# Altium PCB LED strip driver V2.PcbDoc
Units mm, origin at the board's own origin, x right, y up, seen from the top; angles counter-clockwise.
Board outline 41.35 x 36.82 mm, 2 copper layers (Top Layer, Bottom Layer); 37 components, 35 nets, 122 pads, 15 vias.
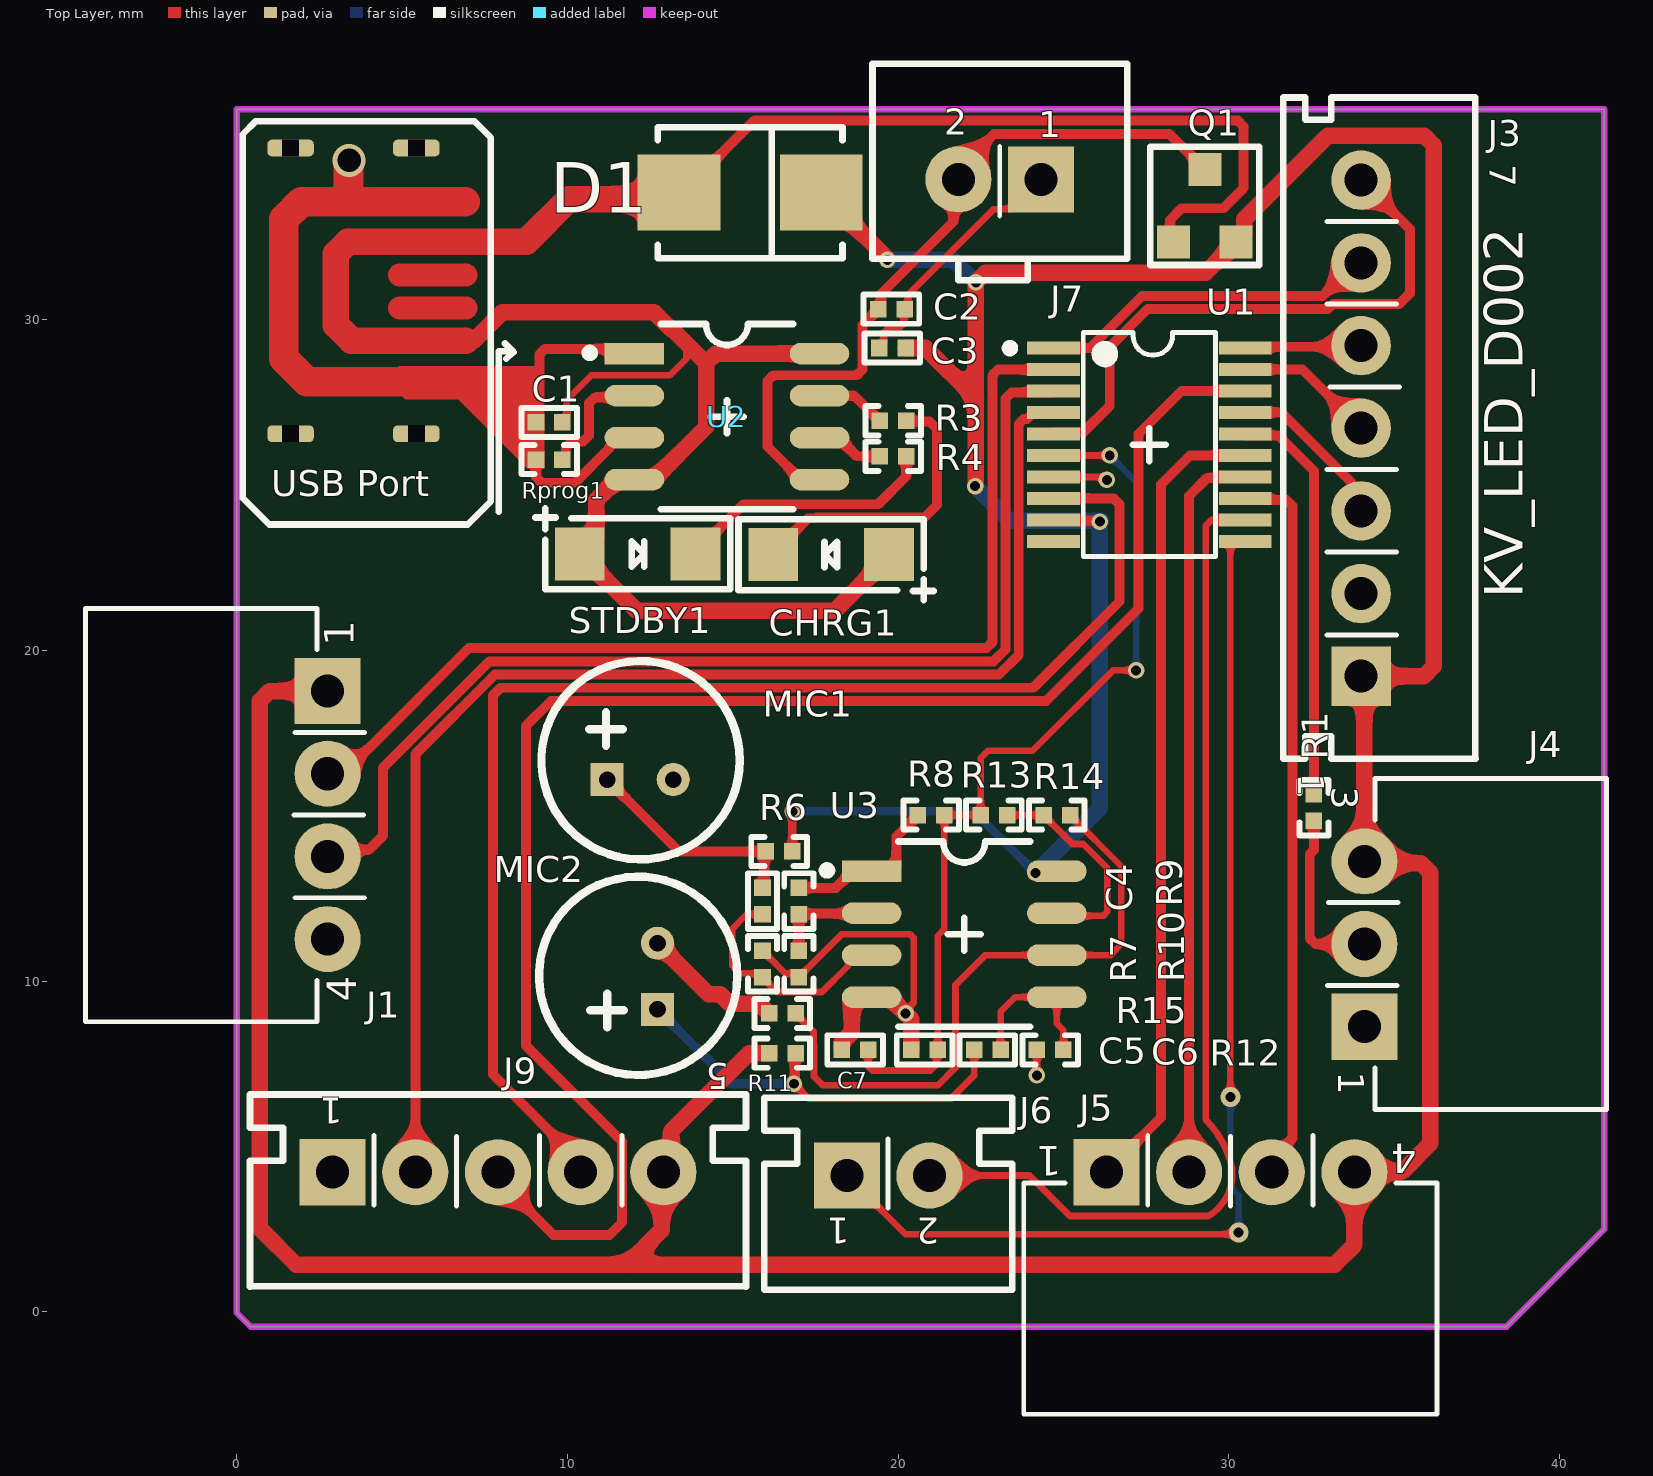
[diagram p0: Top Layer view]
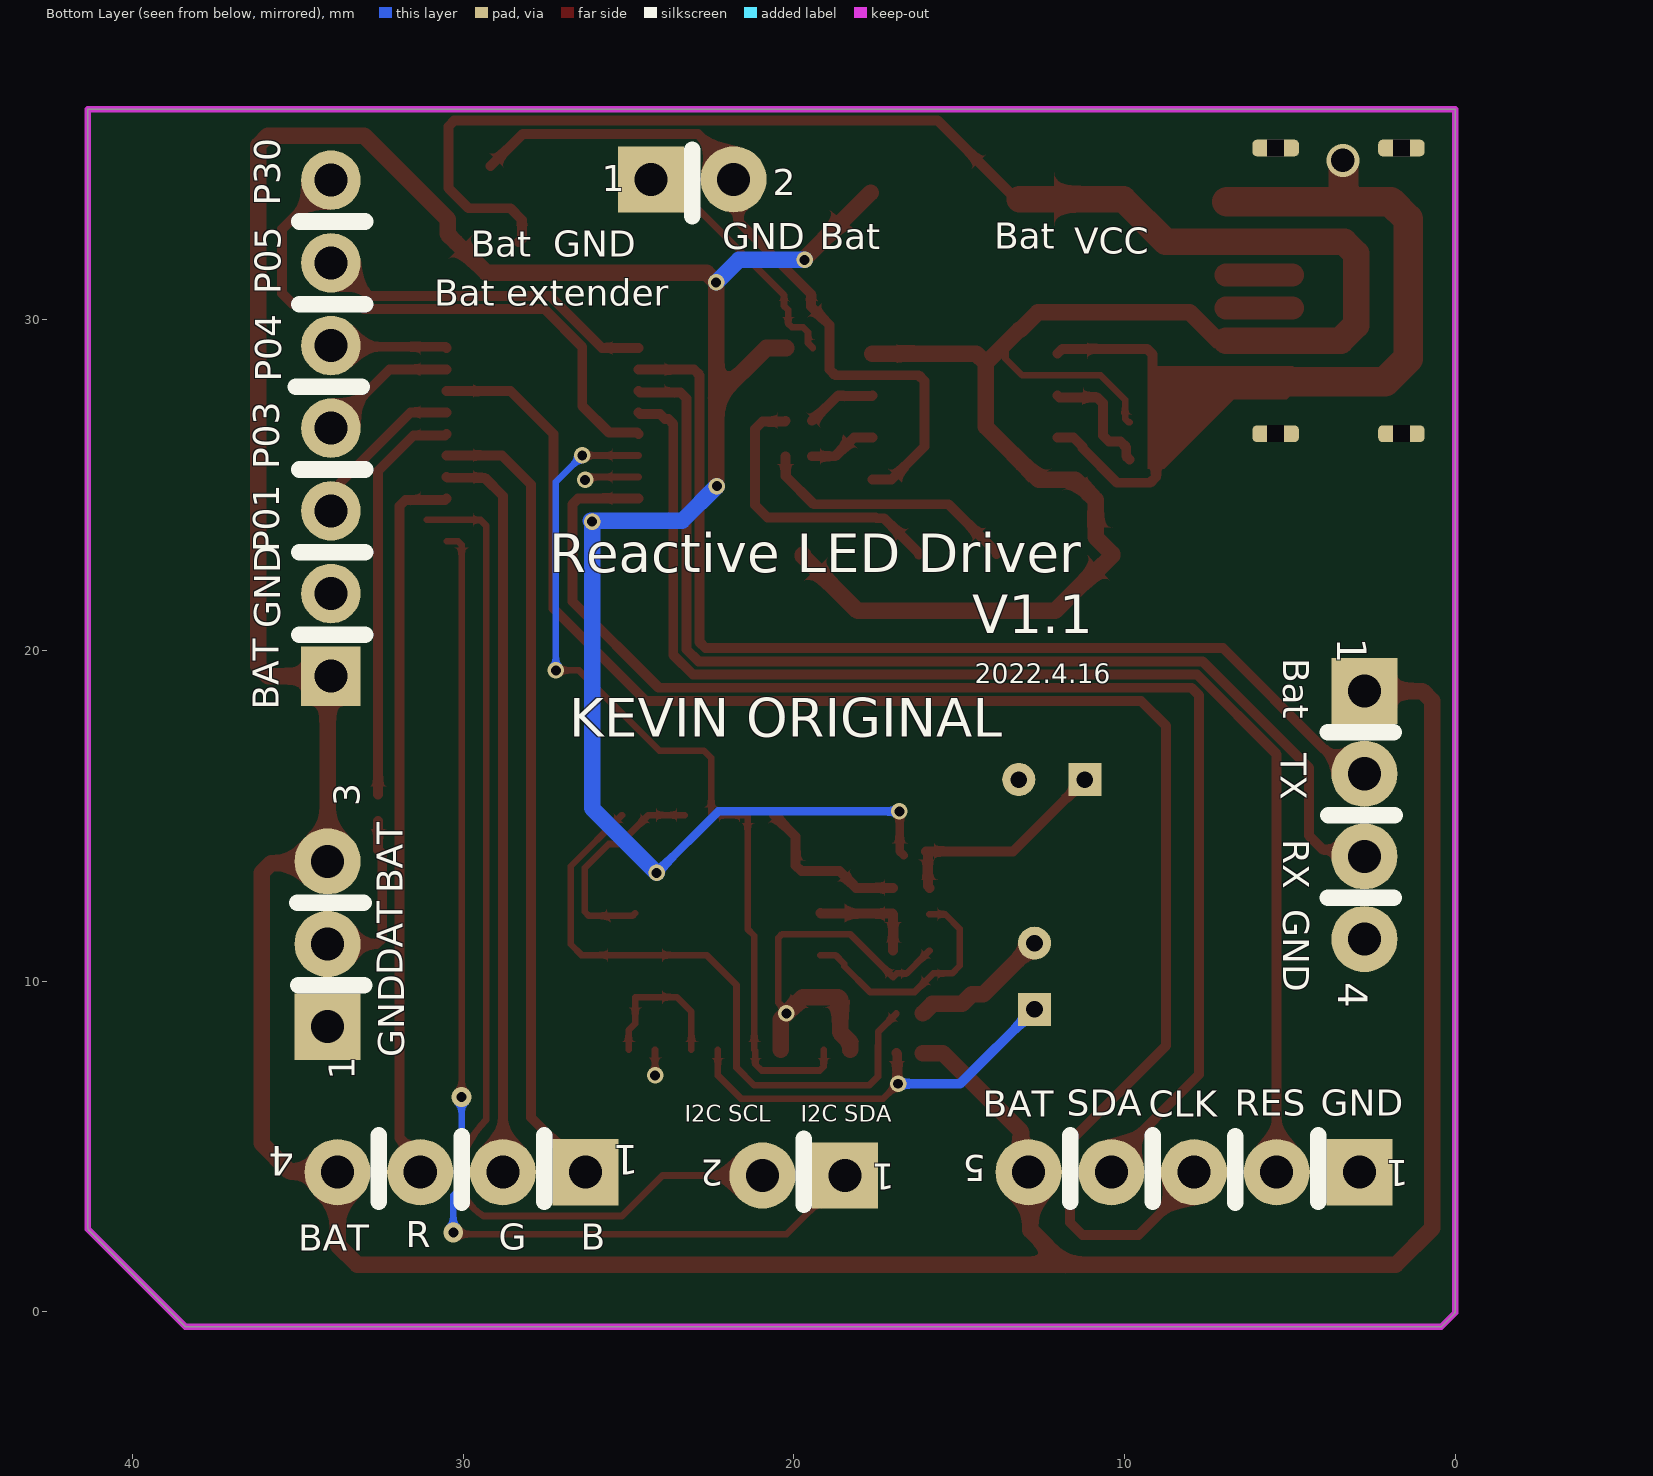
[diagram p1: Bottom Layer view, seen from below]
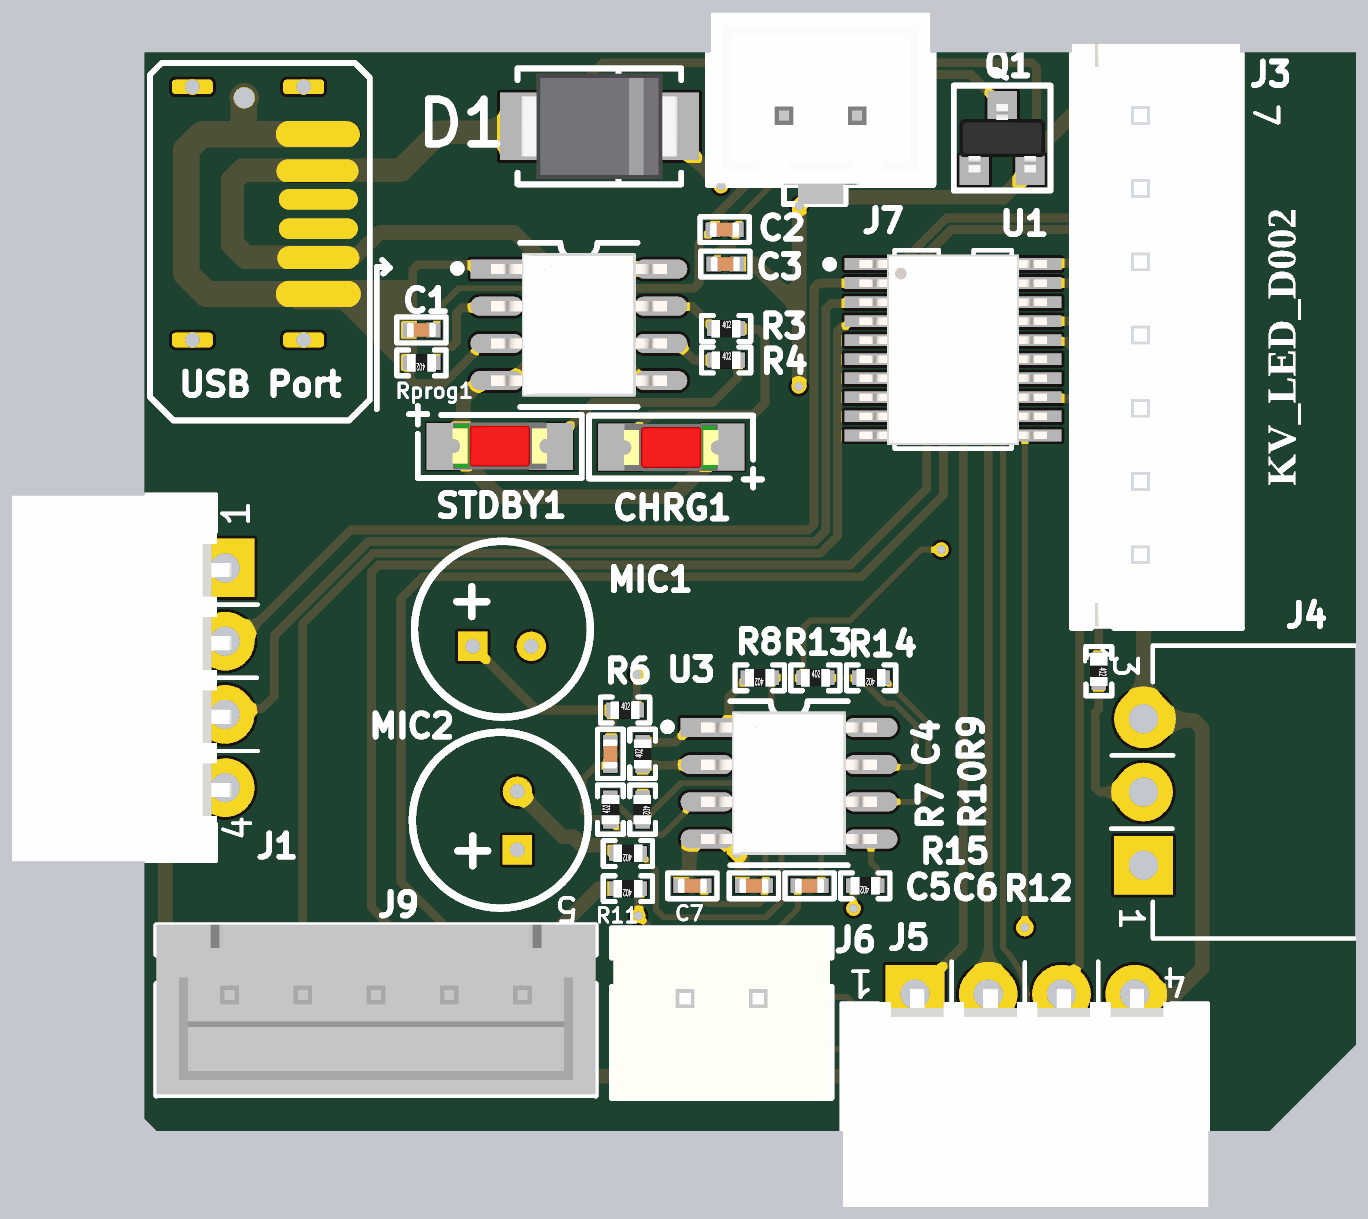
[diagram p2: 3D render of the assembled board from above, using the file's embedded part models]

## Layer stack, top to bottom
Top Solder: solder mask 0.0102, Solder Resist, Dk 3.5
Top Layer: signal copper 0.0356
Dielectric 1: dielectric 0.32, FR-4, Dk 4.8
Bottom Layer: signal copper 0.0356
Bottom Solder: solder mask 0.0102, Solder Resist, Dk 3.5

## Board outline
0.425,-0.45 0,-0.025 0,36.375 41.35,36.375 41.35,2.5 38.4,-0.45

## Design rules (kind name [scope] priority, off if disabled: settings)
Clearance [All] p1: gap=0.1 ignorepadtopadclearanceinfootprint=FALSE
PolygonConnect [All] p1: connectstyle=Direct reliefconductorwidth=0.254 reliefentries=4 polygonreliefangle="90 Angle" airgapwidth=0.254
RoutingVias [All] p1: holewidth=0.711 width=1.27 viastyle="Through Hole" minholewidth=0.711 minwidth=1.27 maxholewidth=0.711 maxwidth=1.27
SolderMaskExpansion [All] p1: expansion=0.102 istentingtop=FALSE
Width [All] p1: maxlimit=1 minlimit=0.1 preferedwidth=0.254
30 further rules are at their usual default settings.

## Components (designator, comment, footprint, x,y, rotation, side; value= is the part's Value field where it differs from the comment)
C1 "T542011037308" CAPC0402-RW 9.45,26.9 r180 top value=10uF
C2 "T542011037308" CAPC0402-RW 19.8,30.325 r0 top value=10uF
C3 "T542011037308" CAPC0402-RW 19.825,29.15 r180 top value=4.7uF
C4 "T542011037308" CAPC0402-RW 15.9,12.425 r270 top value=1uF
C5 "T542011037308" CAPC0402-RW 20.8,7.925 r0 top value=10uF
C6 "T542011037308" CAPC0402-RW 22.7,7.925 r0 top value=1uF
C7 "T542011037308" CAPC0402-RW 18.7,7.925 r0 top value=10uF
CHRG1 "LED1206R_23-21\R6C-AM1N2AY\2A" LED1206-RED 17.975,22.9 r180 top
D1 "DIO STPS2200U" SMB 15.525,33.85 r0 top
J1 "CCN250010-0504" "CONN 4P PH=2.5mm RA WHITE HAA250A-4" 2.75,15.025 r90 top value=2.5mm
J3 "CCN250000-0107" "CONN 7P PH=2.5MM ST WAFER" 34,26.725 r270 top
J4 "CCN250000-0503" "CONN 3P PH=2.5mm HAA250A-3 90" 34.1,11.125 r270 top
J5 "CCN250010-0504" "CONN 4P PH=2.5mm RA WHITE HAA250A-4" 30.05,4.225 r180 top value=2.5mm
J6 "CCN250000-0102" "CONN 2P PH=2.5mm B2B-XH-A" 19.7,4.125 r180 top value=2.5mm
J7 "T690300125300" "CONN 2P PH=2.5mm HAA250A-2 WHITE" 23.075,34.25 r0 top value=2.5mm
J9 "T690300112400" "CONN 5P PH=2.5mm TJC3-5A-CS" 7.9,4.225 r180 top value=2.5mm
MIC1 "MIC" MIC-6022 11.2,16.1 r0 top
MIC2 "MIC" MIC-6022 12.725,9.15 r90 top
Q1 "SI2301CDS" SOT23-132-RW 29.275,33.45 r0 top
R1 "QCF167240-1000" 0402-RW 32.575,15.25 r270 top value=33R
R3 "QCF167240-1000" 0402-RW 19.85,26.95 r0 top value=1k
R4 "QCF167240-1000" 0402-RW 19.85,25.875 r0 top value=1k
R6 "QCF167240-1000" 0402-RW 16.4,13.925 r0 top value=1k
R7 "QCF167240-1000" 0402-RW 15.9,10.525 r90 top value=9.1k
R8 "QCF167240-1000" 0402-RW 21,15.025 r180 top value=1k
R9 "QCF167240-1000" 0402-RW 17,12.425 r90 top value=100K
R10 "QCF167240-1000" 0402-RW 17,10.525 r270 top value=1K
R11 "QCF167240-1000" 0402-RW 16.5,7.825 r180 top value=1k
R12 "QCF167240-1000" 0402-RW 24.6,7.925 r180 top value=9.1k
R13 "QCF167240-1000" 0402-RW 22.9,15.025 r0 top value=1k
R14 "QCF167240-1000" 0402-RW 24.8,15.025 r180 top value=100K
R15 "QCF167240-1000" 0402-RW 16.5,9.025 r180 top value=1k
Rprog1 "QCF167240-1000" 0402-RW 9.45,25.775 r180 top value=1.1k
STDBY1 "LED1206R_23-21\R6C-AM1N2AY\2A" LED1206-RED 12.125,22.925 r0 top
U1 "RCI800336-0001" TSSOP20 27.6,26.225 r270 top
U2 "RCI240512-0001" SO8 14.825,27.075 r0 top
U3 "RCI000358-0001" SO8 22,11.425 r0 top

## Footprints (in the part's own frame and the unit in brackets; to place one, negate y for a bottom-side part, rotate by r counter-clockwise, add the part's x,y. Pads: shape width x height; smd on the part's side, far side on the other; paste and mask are expansions set on the pad)
0402-RW [mm]
  rect 0.5x0.5 smd mask+0.05: 1(-0.4,0) 2(0.4,0)
  silkscreen extent -0.84,-0.44 0.84,0.44, body extent -0.5,-0.3 0.5,0.3, height 0.2
CAPC0402-RW [mm] "Body size: L1.0XW0.5mmXT0.5mm"
  rect 0.5x0.5 smd mask+0.05: 1(-0.4,0) 2(0.4,0)
  silkscreen extent -0.84,-0.44 0.84,0.44, body extent -0.5,-0.25 0.5,0.25, height 0.5
"CONN 2P PH=2.5mm B2B-XH-A" [mm] "CONN 2P PH=2.5mm B2B-XH-A H7mm"
  rect 2x2 hole 1: 1(1.25,0)
  round 2 hole 1: 2(-1.25,0)
  silkscreen extent -3.75,-2.35 3.75,3.45, body extent -3.7,-2.32 3.7,3.43, height 7
"CONN 2P PH=2.5mm HAA250A-2 WHITE" [mm] "CONN 2P PH=2.5mm HAA250A-2 WHITE"
  rect 2x2 hole 1: 1(1.25,0)
  round 2 hole 1: 2(-1.25,0)
  silkscreen extent -3.85,-3.05 3.85,3.5, body extent -3.75,-3.05 3.75,3.5, height 7.4
"CONN 3P PH=2.5mm HAA250A-3 90" [mm] "CONNECTOR 3PIN P=2.5 White 90'"
  rect 2x2 hole 1: 1(2.5,0)
  round 2 hole 1: 2(0,0) 3(-2.5,0)
  silkscreen extent -5,-1.11 5,7.32, body extent -5,-0.25 5,7.32, height 5.75
"CONN 4P PH=2.5mm RA WHITE HAA250A-4" [mm] "CONN 4P PH=2.5mm HAA250A-4 H5.8mm WHITE Color"
  rect 2x2 hole 1: 1(3.75,0)
  round 2 hole 1: 2(1.25,0) 3(-1.25,0) 4(-3.75,0)
  silkscreen extent -6.25,-1.11 6.25,7.32, body extent -6.28,-0.23 6.22,7.27, height 5.85
"CONN 5P PH=2.5mm TJC3-5A-CS" [mm] "CONN 5P PH=2.5mm TJC3-5A-CS"
  rect 2x2 hole 1: 1(5,0)
  round 2 hole 1: 2(2.5,0) 3(0,0) 4(-2.5,0) 5(-5,0)
  silkscreen extent -7.5,-2.35 7.5,3.47, body extent -7.5,-2.37 7.5,3.43, height 7.2
"CONN 7P PH=2.5MM ST WAFER" [mm] "WAFER 7PIN P=2.5mm 90' 单排"
  rect 1.8x1.8 hole 1: 1(7.5,0)
  round 1.8 hole 1: 2(5,0) 3(2.5,0) 4(0,0) 5(-2.5,0) 6(-5,0) 7(-7.5,0)
  silkscreen extent -10,-2.35 10,3.46, body extent -9.95,-2.35 9.95,3.4, height 7
LED1206-RED [mm]
  rect 1.5x1.6 smd mask+0.05: 1(-1.75,0) 2(1.75,0)
  silkscreen extent -3.1,-1.07 2.8,1.38, body extent -1.61,-0.79 1.61,0.81, height 1.1
MIC-6022 [mm]
  rect 1x1 hole 0.5: 1(0,0)
  round 1 hole 0.5: 2(2,0)
  silkscreen extent -1.98,-2.41 4.01,3.58
SMB [mm] "SMB Body W 3.94mm L 4.70mm Max"
  rect 2.5x2.3 smd: 1(-2.15,0) 2(2.15,0)
  silkscreen extent -2.79,-1.98 2.79,1.98, body extent -2.7,-1.8 2.7,1.8, height 2.27
SO8 [mm] "SO8 8Pin Pitch 1.27mm Body 4.9mm X 3.9mm"
  rect 1.8x0.65 smd: 1(-2.8,1.905)
  oval 1.8x0.65 smd: 2(-2.8,0.635) 3(-2.8,-0.635) 4(-2.8,-1.905) 5(2.8,-1.905) 6(2.8,-0.635) 7(2.8,0.635) 8(2.8,1.905)
  silkscreen extent -4.25,-2.8 2,2.8, body extent -3,-2.45 3,2.45, height 1.75
SOT23-132-RW [mm]
  rect 1x1 smd: 1(-0.95,-1.1) 2(0.95,-1.1) 3(0,1.1)
  silkscreen extent -1.65,-1.79 1.65,1.79, body extent -1.46,-1.17 1.46,1.17, height 1
TSSOP20 [mm] "TSSOP,Exposed Paddle,0.65mm,pitch;20 pin,4.60mm W X 6.6mm L X 1.20mm H body"
  rect 0.4x1.6 smd: 1(-2.925,-2.9) 2(-2.275,-2.9) 3(-1.625,-2.9) 4(-0.975,-2.9) 5(-0.325,-2.9) 6(0.325,-2.9) 7(0.975,-2.9) 8(1.625,-2.9) 9(2.275,-2.9) 10(2.925,-2.9) 11(2.925,2.9) 12(2.275,2.9) 13(1.625,2.9) 14(0.975,2.9) 15(0.325,2.9) 16(-0.325,2.9) 17(-0.975,2.9) 18(-1.625,2.9) 19(-2.275,2.9) 20(-2.925,2.9)
  silkscreen extent -3.4,-4.32 3.37,2, body extent -3.25,-3.2 3.25,3.2, height 1.1

## Part data
C1 C2 C3 C4 C5 C6 C7: library part "CAP0402 0.01uF 16V 10%_X7R_WALSIN", "CAP X7R .01UF 16V +-10% 0402 WALSIN L", PACKAGE=CAPC0402, Tolerance=10%, Voltage=16V, CREATE_NAME=Nathan, CREATE_TIME=10-Jan-2020, Customer Specific=N/A, DIP&SMD=SMD, MFG=WALSIN, MFG Part=0402B103K160, Other=X7R, SAP=T542011037308, Type=Capacitor
CHRG1: "CHIP LED RED TYPE 1206", Color=Red, PACKAGE=1206, CREATE_NAME=Nathan, CREATE_TIME=18-Aug-2020, DIP&SMD=SMD, MFG=EVERLIGHT, MFG Part=23-21\R6C-AM1N2AY\2A, Type=LED
D1: "DIODE SCHOTTKY 200V 2A SMB", PACKAGE=SMB, CREATE_NAME=Nathan, CREATE_TIME=19-Jun-2020, Customer Specific=N/A, DIP&SMD=SMD, MFG=STMicroelectronics, MFG Part=STPS2200U, Type=DIODE
J1 J5: library part "CONN 4P PH=2.5mm  RA WHITE HAA250A-4", "CONN. 4P P=2.5mm 90' HAA250A-4 RA WHITE", Current=3A, DIP&SMD=DIP, MFG=金科基, MFG Part="HAA250A-4 WHITE", SAP=T690300038000, Type=Connector
J3: library part "CONN 7P PH=2.5mm B4B-XH-A ST", "GP CONNECTOR B4B-XH-A 7 PIN G", CREATE_NAME=Nathan, CREATE_TIME=24-Sep-2014, DIP&SMD=DIP, MFG=金瑞康, MFG Part=B4B-XH-A, SAP=T690300029200, Type=Connector
J4: library part "CONN 3P PH=2.5mm HAA250A-3 90", "CONNECTOR 3PIN P=2.5 White 90'", CREATE_NAME=TOM@Deftronics, CREATE_TIME=16-Apr-2014, DIP&SMD=DIP, MFG=金科基, SAP=T690300023700, Type=Connector
J6: library part "CONN 2P PH=2.5mm B2B-XH-A", "GP CONNECTOR B2B-XH-A 2 PIN G", Current=3A, DIP&SMD=DIP, MFG=金瑞康, MFG Part=HAA250A-2A-WHITE, SAP=T690300041200, Type=Connector, Vendor Code=10009989, Vendor Name=亿源电子有限公司
J7: library part "CONN 2P PH=2.5mm HAA250A-2 BLACK", "CONNECTOR HA2.5 2PIN BLACK K", Current=3A, CREATE_NAME=Nathan, CREATE_TIME=24-Nov-2017, DIP&SMD=DIP, MFG=金瑞康, MFG Part="HAA250A-2 BLACK", SAP=T690300125300, Type=Connector
J9: library part "CONN 5P PH=2.5mm TJC3-5A-CS", "CONNECTOR 5PIN P:2.5MM WHITE M180 K", CREATE_NAME=Nathan, CREATE_TIME=18-July-2017, DIP&SMD=DIP, MFG="JIN JIA", MFG Part=TJC3-5A-CS, SAP=T690300112400, Type=Connector
Q1: "PMOS FET-Si2301CDS", PACKAGE=SOT23, CREATE_NAME=Nathan, CREATE_TIME=17-Nov-2020, Customer Specific=N/A, DIP&SMD=SMD, MFG=VISHAY, MFG Part=SI2301CDS, Type=PMOS
R1 R3 R4 R6 R7 R8 R9 R10 R11 R12 R13 R14 R15 Rprog1: library part "RES0402 1/16W 0.1% 100 OHM", "CHIP RES 100 OHM 1/16W 0.1% 0402", PACKAGE=0402, Power=1/16W, CREATE_NAME=TOM@Deftronics, CREATE_TIME=05-Jun-2014, Customer Specific=N/A, DIP&SMD=SMD, SAP=T501100001129, Type=Resistor
STDBY1: "CHIP LED RED TYPE 1206", Color=Blue, PACKAGE=1206, CREATE_NAME=Nathan, CREATE_TIME=18-Aug-2020, DIP&SMD=SMD, MFG=EVERLIGHT, MFG Part=23-21\R6C-AM1N2AY\2A, Type=LED
U1: library part N76E003, "IC MCU 20P TSSOP20", CREATE_NAME=GordonL@Deftronics, CREATE_TIME=23-Mar-2014, Customer Specific=N/A, DIP&SMD=SMD, MFG=ST, MFG Part=STM8S003F3P6, SAP=T610300083725, Type=IC
U2: library part 24LC512, "IC 8P 24LC512T-I/SN  SO-8", Customer Specific=N/A, DIP&SMD=SMD, MFG=MICROCHIP, MFG Part=TP4056, SAP=T610100064201, Type=IC, Vendor Code=10020271, Vendor Name="MICROCHIP TECHNOLOGY IRELAND LTD"
U3: library part LM358AM, "IC OP-AMP Dual LM358 DUAL OP-AMP SOIC8", Customer Specific=N/A, DIP&SMD=SMD, MFG="National SEMI", MFG Part=LM358AM, SAP=T610500008001, Type="IC AMP", Vendor Code=10020355, Vendor Name="SERIAL MICROELECTRONICS (HK) LIMITE"

## Free pads (board coordinates)
  rrect50% 1.4x0.5 hole 0.5 square: 3(1.63,26.558) 3(1.63,35.198) 3(5.43,26.558) 3(5.43,35.198)

## Via types
v1: diameter 0.5, hole 0.3, Top Layer to Bottom Layer, 12 vias
v2: diameter 0.6, hole 0.3, Top Layer to Bottom Layer, 2 vias
v3: diameter 1, hole 0.711, Top Layer to Bottom Layer, tented both sides, 1 vias

## Nets (pads, with @x,y where several pads share a name; then routed paths per layer and width w, separated by ;. In a path a pad name is that pad's centre, name@x,y a point inside that pad or via, vN(x,y) a via of type N, cw(c..) or ccw(c..) an arc to the next point about the centre after c; other vN are vias at no path point)
GND: C1.2 C2.2 C3.2 C5.1 C7.1 J1.4 J3.2 J4.1 J7.1 J9.1 MIC1.2 MIC2.2 R7.2 R10.2 R12.2 R15.2 Rprog1.2 U1.7 U2.1 U2.3 U3.4 | length 52.1
  Top Layer w0.2: R7.2 16.05,10.775 16.588,10.237 16.888,10.237 R10.2 18.3,11.425 20.358,11.425 20.475,11.308 20.475,9.356 20.225,9.106 20.225,9.029 v1(20.225,9.025) ; C3.2 19.575,29.3 19.575,29.625 19.725,29.775 20.058,29.775 20.175,29.892 C2.2@20.175,30.3 ; C2.2 20.3,30.425 20.3,30.75 22.9,33.35 23.425,33.35 J7.1 ; v1(24.2,7.15) R12.2 ; U1.7 26.225,25.25 v1(26.313,25.162) v1@26.4,25.075
  Top Layer w0.3: Rprog1.2 9.05,25.25 9.225,25.075 10.225,25.075 11.275,26.125 11.275,26.17 11.545,26.44 U2.3 ; 9.15,27.99 9.15,28.949 9.326,29.125 11.88,29.125 U2.1
  Top Layer w0.5: MIC2.2 14.275,9.6 14.625,9.6 14.912,9.313 15.812,9.313 R15.2 ; C7.1 18.3,8.154 18.596,8.451 18.596,9.451 18.666,9.52 U3.4 19.734,9.52 v1@20.225,9.029 ; v1@20.227,9.027 20.4,8.854 C5.1
  Top Layer w0.9: 3.35,33.575 6.9,33.575 ; v3(3.4,34.825) 3.381,34.806 3.381,33.925 3.331,33.875 3.331,33.581 3.325,33.575 1.952,33.575 1.425,33.048 1.425,28.825 2.122,28.128 6.93,28.128
I2C_SCL: J6.2 U1.12 | length 32.2
  Top Layer w0.2: J6.2 23.975,4.125 25.2,2.9 29.383,2.9 ccw(c28.636,4.176) 30.109,4.047 ccw(c29.91,4.062) 30.108,4.084 cw(c31.3,4.225) 30.105,4.333 ccw(c27.178,3.708) 29.3,5.819 29.3,23.771 29.479,23.95 U1.12@31.1,23.95
I2C_SDA: J6.1 U1.11 | length 34
  Top Layer w0.2: J6.1 20.225,2.35 30.25,2.35 v2(30.3,2.4) ; v2(30.05,6.5) 30.05,23.2 30.15,23.3 U1.11
  Bottom Layer w0.2: v2(30.05,6.5) 30.05,3.778 30.3,3.528 v2(30.3,2.4)
NetC4_1: C4.1 MIC1.1 R6.1 | length 6.8
  Top Layer w0.3: MIC1.1 13.375,13.925 R6.1 15.95,13.875 15.95,12.875 C4.1
NetC4_2: C4.2 R7.1 U3.3 | length 7.3
  Top Layer w0.2: C4.2 15.425,12.025 14.983,11.583 14.983,10.467 15.213,10.237 15.788,10.237 16.35,9.675 17.7,9.675 18.478,10.453 18.478,10.521 18.747,10.79 U3.3
NetC6_1: C6.1 MIC2.1 R11.1 | length 12.7
  Top Layer w0.2: v1(16.85,6.9) 17.3,6.45 21.6,6.45 22.3,7.15 C6.1
  Top Layer w0.3: v1(16.85,6.9) 16.875,6.925 16.875,7.8 R11.1
  Bottom Layer w0.3: MIC2.1 14.975,6.9 v1(16.85,6.9)
NetC6_2: C6.2 R12.1 U3.5 | length 4.7
  Top Layer w0.2: C6.2 23.1,9.075 23.545,9.52 U3.5 24.8,8.719 25,8.519 R12.1
NetCHRG1_2: CHRG1.2 R3.2 | length 8.9
  Top Layer w0.3: CHRG1.2 16.225,22.95 17.275,24 17.5,24 17.525,24.025 20.8,24.025 21.175,24.4 21.175,26.699 20.95,26.924 20.276,26.924 R3.2
NetJ3_3: J3.3 U1.17 | length 5.1
  Top Layer w0.3: U1.17 31.6,27.2 33.713,25.087 33.713,24.512 J3.3
NetJ3_4: J3.4 U1.19 | length 4.2
  Top Layer w0.3: U1.19 32.225,28.5 J3.4
NetJ3_5: J3.5 U1.20 | length 3.5
  Top Layer w0.3: U1.20 30.538,29.188 33.963,29.188 J3.5
NetJ3_6: J3.6 U1.1 | length 10.4
  Top Layer w0.3: U1.1 25.8,29.15 27.375,30.725 32.839,30.725 33.839,31.725 J3.6
NetJ3_7: J3.7 U1.5 | length 17.6
  Top Layer w0.3: U1.5 24.75,26.6 25.6,26.6 26.401,27.401 26.401,29.185 27.541,30.325 33.005,30.325 33.155,30.475 35.15,30.475 35.475,30.8 35.475,32.75 J3.7
NetJ5_1: J5.1 U1.15 | length 24.4
  Top Layer w0.3: J5.1 27.95,5.875 27.95,25.025 28.825,25.9 U1.15
NetJ5_2: J5.2 U1.14 | length 22.4
  Top Layer w0.3: J5.2 28.8,24.675 29.35,25.225 30.475,25.225 U1.14
NetJ5_3: J5.3 U1.13 | length 21.9
  Top Layer w0.3: U1.13 30.55,24.55 31.749,24.55 31.925,24.374 31.925,5.251 31.3,4.626 J5.3
NetR1_1: R1.1 U1.16 | length 12.3
  Top Layer w0.3: U1.16 30.55,26.5 31.5,26.5 32.575,25.425 R1.1
NetR3_1: R3.1 U2.7 | length 2.1
  Top Layer w0.3: U2.7 17.634,27.701 18.687,27.701 19.338,27.05 19.35,27.05 R3.1
NetR4_1: R4.1 U2.6 | length 2.1
  Top Layer w0.3: U2.6 18.185,26.44 18.75,25.875 R4.1
NetR4_2: R4.2 STDBY1.2 | length 8
  Top Layer w0.3: STDBY1.2 13.875,22.975 15.325,24.425 19.4,24.425 20.25,25.275 R4.2
NetR8_2: R8.2 R9.2 U3.1 | length 5
  Top Layer w0.3: R9.2 18.12,12.825 18.625,13.33 U3.1 19.775,13.33 19.95,13.505 19.95,14.375 R8.2
NetR9_1: R9.1 R10.1 U3.2 | length 3.3
  Top Layer w0.3: R10.1 R9.1 17.017,12.043 19.183,12.043 U3.2
NetR13_2: R13.2 R14.2 U3.7 | length 6.6
  Top Layer w0.2: R13.2 R14.2 25.275,14.15 25.6,14.15 26.325,13.425 26.325,12.1 26.2,11.975 24.885,11.975 U3.7
NetR14_1: R14.1 R15.1 U3.6 | length 19.3
  Top Layer w0.2: R15.1 17.05,8.875 17.455,8.47 17.455,8.052 17.458,8.05 17.458,7.117 17.725,6.85 21.2,6.85 21.738,7.387 21.738,9.888 22.64,10.79 U3.6 26.423,10.79 26.75,11.117 26.75,13.475 R14.1
NetRprog1_1: Rprog1.1 U2.2 | length 3.7
  Top Layer w0.3: Rprog1.1 9.95,25.875 9.95,26.148 10.126,26.324 10.474,26.324 10.65,26.499 10.65,27.481 10.826,27.657 11.972,27.657 U2.2
RST: J9.2 U1.4 | length 40.3
  Top Layer w0.3: J9.2 5.4,16.865 7.81,19.275 23.056,19.275 23.65,19.869 23.65,26.854 23.796,27 23.9,27 24.05,27.15 24.65,27.15 U1.4
RX: J1.3 U1.3 | length 33.4
  Top Layer w0.3: J1.3 2.951,13.976 4,13.976 4.249,14.225 4.425,14.401 4.425,16.456 7.644,19.675 22.89,19.675 23.25,20.035 23.25,27.624 23.426,27.8 24.65,27.8 U1.3
SCL: J9.3 U1.18 | length 50.1
  Top Layer w0.3: J9.3 7.9,4 9.575,2.325 11.275,2.325 11.65,2.7 11.65,5.15 8.75,8.05 8.75,17.725 9.5,18.475 24.475,18.475 27.275,21.275 27.275,26.55 28.575,27.85 U1.18
SDA: J9.4 U1.8 | length 40.7
  Top Layer w0.3: J9.4 10.4,4.526 7.75,7.176 7.75,18.649 7.976,18.875 24.09,18.875 26.7,21.485 26.7,24.424 26.524,24.6 U1.8
Sound_sig: C5.2 C7.2 R8.1 R13.1 U1.6 | length 27.3
  Top Layer w0.2: C7.2 19.1,7.417 19.217,7.3 20.975,7.3 21.167,7.492 21.167,7.892 C5.2 21.2,11.375 21.4,11.575 R8.1 R13.1@22.3,15.025 ; R13.1 22.5,16.75 22.725,16.975 24.075,16.975 26.5,19.4 v1(27.2,19.4) ; U1.6 v1(26.4,25.9)
  Bottom Layer w0.2: v1(26.4,25.9) 27.2,25.1 v1(27.2,19.4)
TX: J1.2 U1.2 | length 31.7
  Top Layer w0.3: J1.2 3.21,16.275 3.963,17.028 3.978,17.028 7.025,20.075 22.674,20.075 22.85,20.251 22.85,28.324 23.026,28.5 U1.2
V_bat: C2.1 J7.2 Q1.3 U2.5 | length 22.4
  Top Layer w0.3: U2.5 17.05,25.17 16.05,26.17 16.05,28.149 16.226,28.325 18.749,28.325 18.925,28.501 18.925,29.85 19.481,30.406 19.481,30.781 21.676,32.976 21.676,34.101 J7.2 21.825,34.55 22.9,35.625 28.2,35.625 Q1.3@29.175,34.65
V_O: C3.1 D1.2 J1.1 J3.1 J4.3 J5.4 J9.5 Q1.2 R6.2 R11.2 U1.9 U3.8 | length 156.8
  Top Layer w0.254: R6.2@16.677,13.802 R6.2 16.8,15.125 v1(16.813,15.138) v1@16.825,15.15
  Top Layer w0.3: U1.9 24.725,23.925 26.075,23.925 v1(26.1,23.9)
  Top Layer w0.5: J1.1 0.993,18.775 0.7,18.482 0.7,2.525 1.8,1.425 11.8,1.425 ; R11.2 15.5,7.825 13.137,5.462 13.137,4.462 J9.5 12.85,4.175 12.85,2.475 11.8,1.425 ; D1.2 19.675,31.85 v1(19.675,31.812) ; C3.1 20.832,29.15 22.35,27.632 ; v1(22.329,24.971) 22.35,24.993 22.35,27.632 ; 11.8,1.425 33.2,1.425 33.8,2.025 J5.4 33.825,4.25 35.25,4.25 36.1,5.1 36.1,13.282 35.807,13.575 34.15,13.575 J4.3 34.1,19.125 J3.1 35.9,19.225 36.2,19.525 36.2,35.282 35.907,35.575 33,35.575 30.475,33.05 30.475,32.6 Q1.2 29.3,31.425 22.643,31.425 v1(22.35,31.132) 22.35,27.632
  Bottom Layer w0.254: v1(16.813,15.138) 22.287,15.138 v1(24.15,13.275)
  Bottom Layer w0.5: v1(19.675,31.812) 21.67,31.812 v1(22.35,31.132) ; v1(22.329,24.971) 23.375,23.925 v1@26.15,23.925 ; v1(24.15,13.275) 26.1,15.225 v1(26.1,23.9)
VCC: C1.1 CHRG1.1 D1.1 Q1.1 STDBY1.1 U2.4 U2.8 | length 76.6
  Top Layer w0.2: C1.1 9.875,26.9 9.986,27.011 9.986,27.586 10.725,28.325 13.1,28.325 13.6,28.825 13.6,29.25
  Top Layer w0.3: D1.1@13.175,33.65 13.275,33.65 15.65,36.025 30.274,36.025 30.45,35.849 30.45,33.982 29.843,33.375 28.575,33.375 28.225,33.025 28.225,32.45 Q1.1
  Top Layer w0.5: 6.925,29.375 7.175,29.375 8.025,30.225 12.625,30.225 13.15,29.7 13.187,29.7 14.2,28.687 ; U2.8 14.493,28.98 14.2,28.687 ; CHRG1.1 19.725,22.85 18.075,21.2 12.1,21.2 10.925,22.375 10.875,22.375 10.375,22.875 STDBY1.1 10.875,23.425 10.875,24.554 11.491,25.17 U2.4 12.6,25.17 14.2,26.77 14.2,28.687
  Top Layer w0.8: 6.925,29.375 3.469,29.375 3,29.844 3,32 3.358,32.358 8.75,32.358 10.043,33.65 D1.1@13.175,33.65
WS_DI: J4.2 R1.2 | length 5.3
  Top Layer w0.3: R1.2 32.575,13.975 32.45,13.85 32.45,11.301 32.626,11.125 J4.2
pads on no net: U1.10
copper on no net: | length 4
  Top Layer w0.7: 4.93,30.358 6.93,30.358 ; 4.93,31.358 6.93,31.358

## Polygon pours and split planes (outlines as drawn)
GND on Bottom Layer "NONET_L02_P000" (solid, shelved, pour order 0): 0.425,-0.45 0,-0.025 0,36.375 41.35,36.375 41.35,2.5 38.4,-0.45

## Keep-outs
Keep-Out Layer:
  the board outline again, w0.2

## Other copper
Top Layer:
  region net GND: 9.3,28.1 9.3,28.6 4.9,28.6 4.9,27.8 5.1,27.6 6.7,27.6 8.8,25.5 9.3,25.5

## Silkscreen, mask and mechanical layers (free items; w line width, h text height)
Top Overlay:
  lines w0.2: 7.925,24.2 7.925,29.05 8.325,29.05 8.325,29 8.15,28.825 ; 8.113,29.288 8.375,29.025 ; 0.184,24.612 0.184,35.612 0.584,36.012 7.184,36.012 7.684,35.512 7.684,24.512 6.984,23.812 0.984,23.812 0.184,24.612
  text "USB Port" at 1.038,24.666 h0.8
  text "KV_LED_D002" at 39.285,21.576 h2 r90
Bottom Overlay:
  text "P30" at 35.541,33.454 h0.8 r270
  text "Bat" at 13.946,32.154 h0.8
  text "Bat" at 19.221,32.129 h0.8
  text "GND" at 22.171,32.129 h0.8
  text "VCC" at 11.521,32.004 h0.8
  text "GND" at 27.283,31.907 h0.8
  text "Bat" at 29.771,31.904 h0.8
  text "P05" at 35.516,30.779 h0.8 r270
  text "Bat extender" at 30.871,30.429 h0.8
  text "P04" at 35.504,28.129 h0.8 r270
  text "P03" at 35.566,25.479 h0.8 r270
  text "P01" at 35.566,22.979 h0.8 r270
  text "Reactive LED Driver" at 27.393,21.975 h2
  text "GND" at 35.529,20.679 h0.8 r270
  text "V1.1" at 14.603,20.127 h2
  text "Bat" at 5.196,19.771 h0.8 r90
  text "2022.4.16" at 14.532,18.812 h1
  text "BAT" at 35.579,18.204 h0.8 r270
  text "KEVIN ORIGINAL" at 26.8,17.002 h2
  text "TX" at 5.271,16.896 h0.8 r90
  text "RX" at 5.196,14.296 h0.8 r90
  text "BAT" at 31.829,12.654 h0.8 r270
  text "GND" at 5.196,12.171 h0.8 r90
  text "DAT" at 31.829,10.179 h0.8 r270
  text "GND" at 31.779,7.704 h0.8 r270
  text "GND" at 4.071,5.929 h0.8
  text "RES" at 6.671,5.929 h0.8
  text "SDA" at 11.746,5.929 h0.8
  text "CLK" at 9.271,5.904 h0.8
  text "BAT" at 14.296,5.904 h0.8
  text "I2C SDA" at 19.8,5.75 h0.5
  text "I2C SCL" at 23.3,5.75 h0.5
  text "R" at 31.746,1.954 h0.8
  text "B" at 26.446,1.879 h0.8
  text "G" at 28.921,1.879 h0.8
  text "BAT" at 34.996,1.854 h0.8
Top Solder:
  lines w0.7: 4.93,30.358 6.93,30.358 ; 4.93,31.358 6.93,31.358
  lines w0.8: 4.9,32.325 6.9,32.325 ; 4.93,29.358 6.93,29.358
  lines w0.9: 4.93,28.128 6.93,28.128 ; 4.93,33.588 6.93,33.588

## Text inside footprints (layer, text, board x,y; h text height)
J1: Top Overlay "4" at 3.614,9.386 h0.89 r90; Top Overlay "1" at 3.537,20.13 h0.89 r90; Bottom Overlay "4" at 3.537,9.97 h0.89 r90; Bottom Overlay "1" at 3.563,20.384 h0.89 r90
J3: Top Overlay "7" at 37.9,34.7 h0.8 r270; Top Overlay "1" at 32.1,16.275 h0.8 r270
J4: Top Overlay "3" at 33.109,15.88 h0.8 r270; Top Overlay "1" at 33.313,7.27 h0.8 r270; Bottom Overlay "3" at 33.135,15.296 h0.8 r270; Bottom Overlay "1" at 33.287,7.016 h0.8 r270
J5: Top Overlay "1" at 24.945,5.012 h0.89 r180; Top Overlay "4" at 35.689,5.089 h0.89 r180; Bottom Overlay "1" at 24.691,5.038 h0.89 r180; Bottom Overlay "4" at 35.105,5.012 h0.89 r180
J6: Top Overlay "2" at 21.25,2.85 h0.8 r180; Top Overlay "1" at 18.532,2.855 h0.8 r180; Bottom Overlay "2" at 22.138,4.608 h0.8 r180; Bottom Overlay "1" at 16.957,4.481 h0.8 r180
J7: Top Overlay "1" at 24.243,35.52 h0.8; Top Overlay "2" at 21.399,35.596 h0.8; Bottom Overlay "1" at 25.818,33.894 h0.8; Bottom Overlay "2" at 20.637,33.767 h0.8
J9: Top Overlay "5" at 14.875,7.525 h0.8 r180; Top Overlay "1" at 3.2,6.475 h0.8 r180; Bottom Overlay "5" at 14.199,4.733 h0.8 r180; Bottom Overlay "1" at 1.407,4.581 h0.8 r180